# Altium PCB PruebaTamano.PcbDoc
Units mm, origin at the board's own origin, x right, y up, seen from the top; angles counter-clockwise.
Board outline 100 x 100 mm, 4 copper layers (Top Layer, Int1 (V5), Int2 (PWR), Bottom Layer), stack 1.369 mm thick; 79 components, 45 nets, 282 pads, 6 vias.
Unrouted connection lines stored in the file: 129.
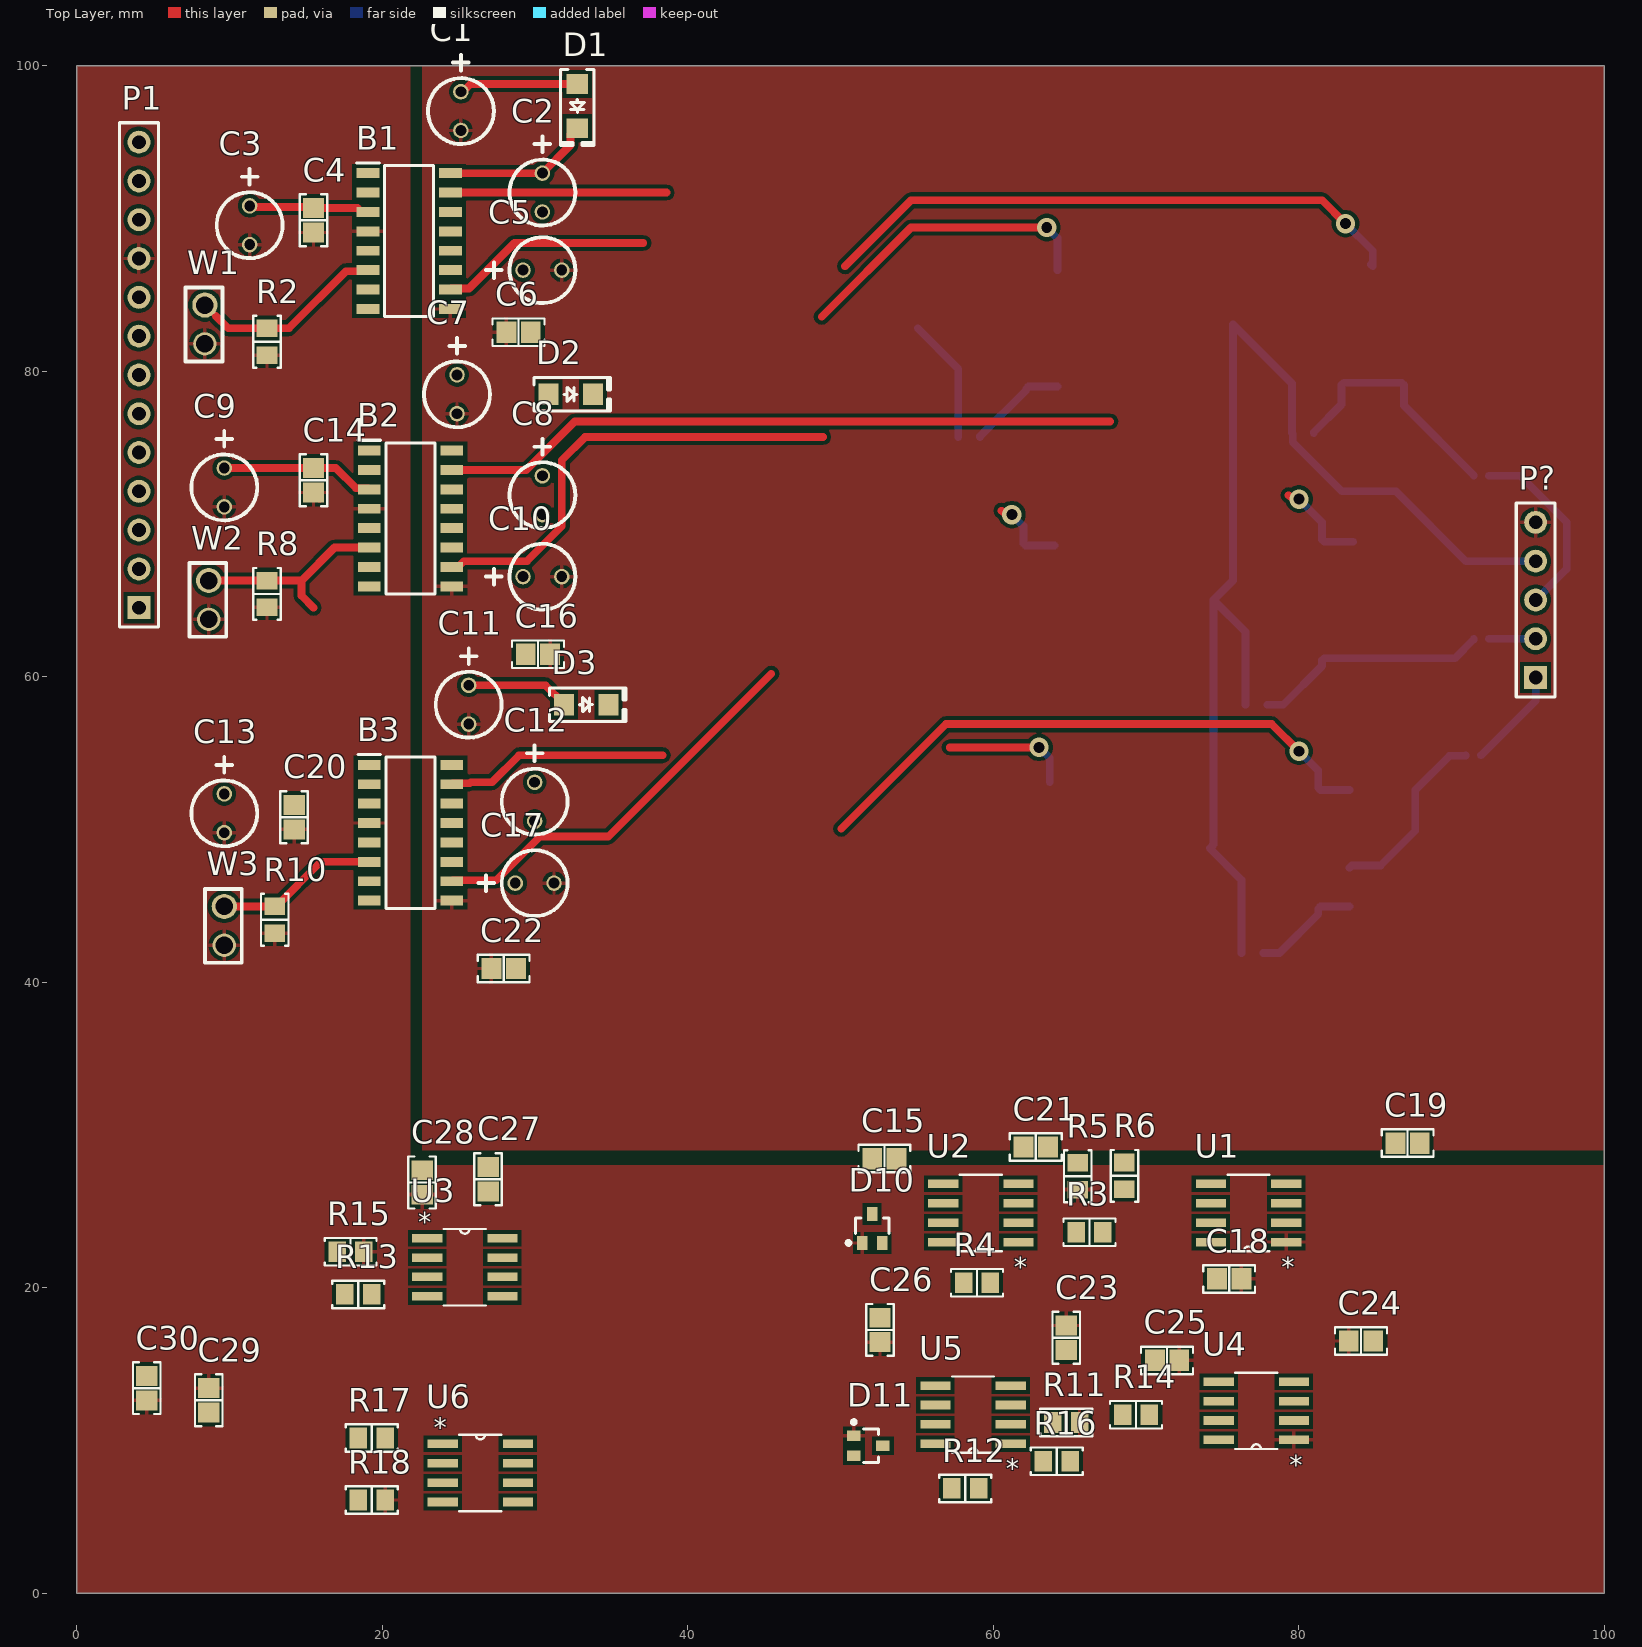
[diagram p0: Top Layer view]
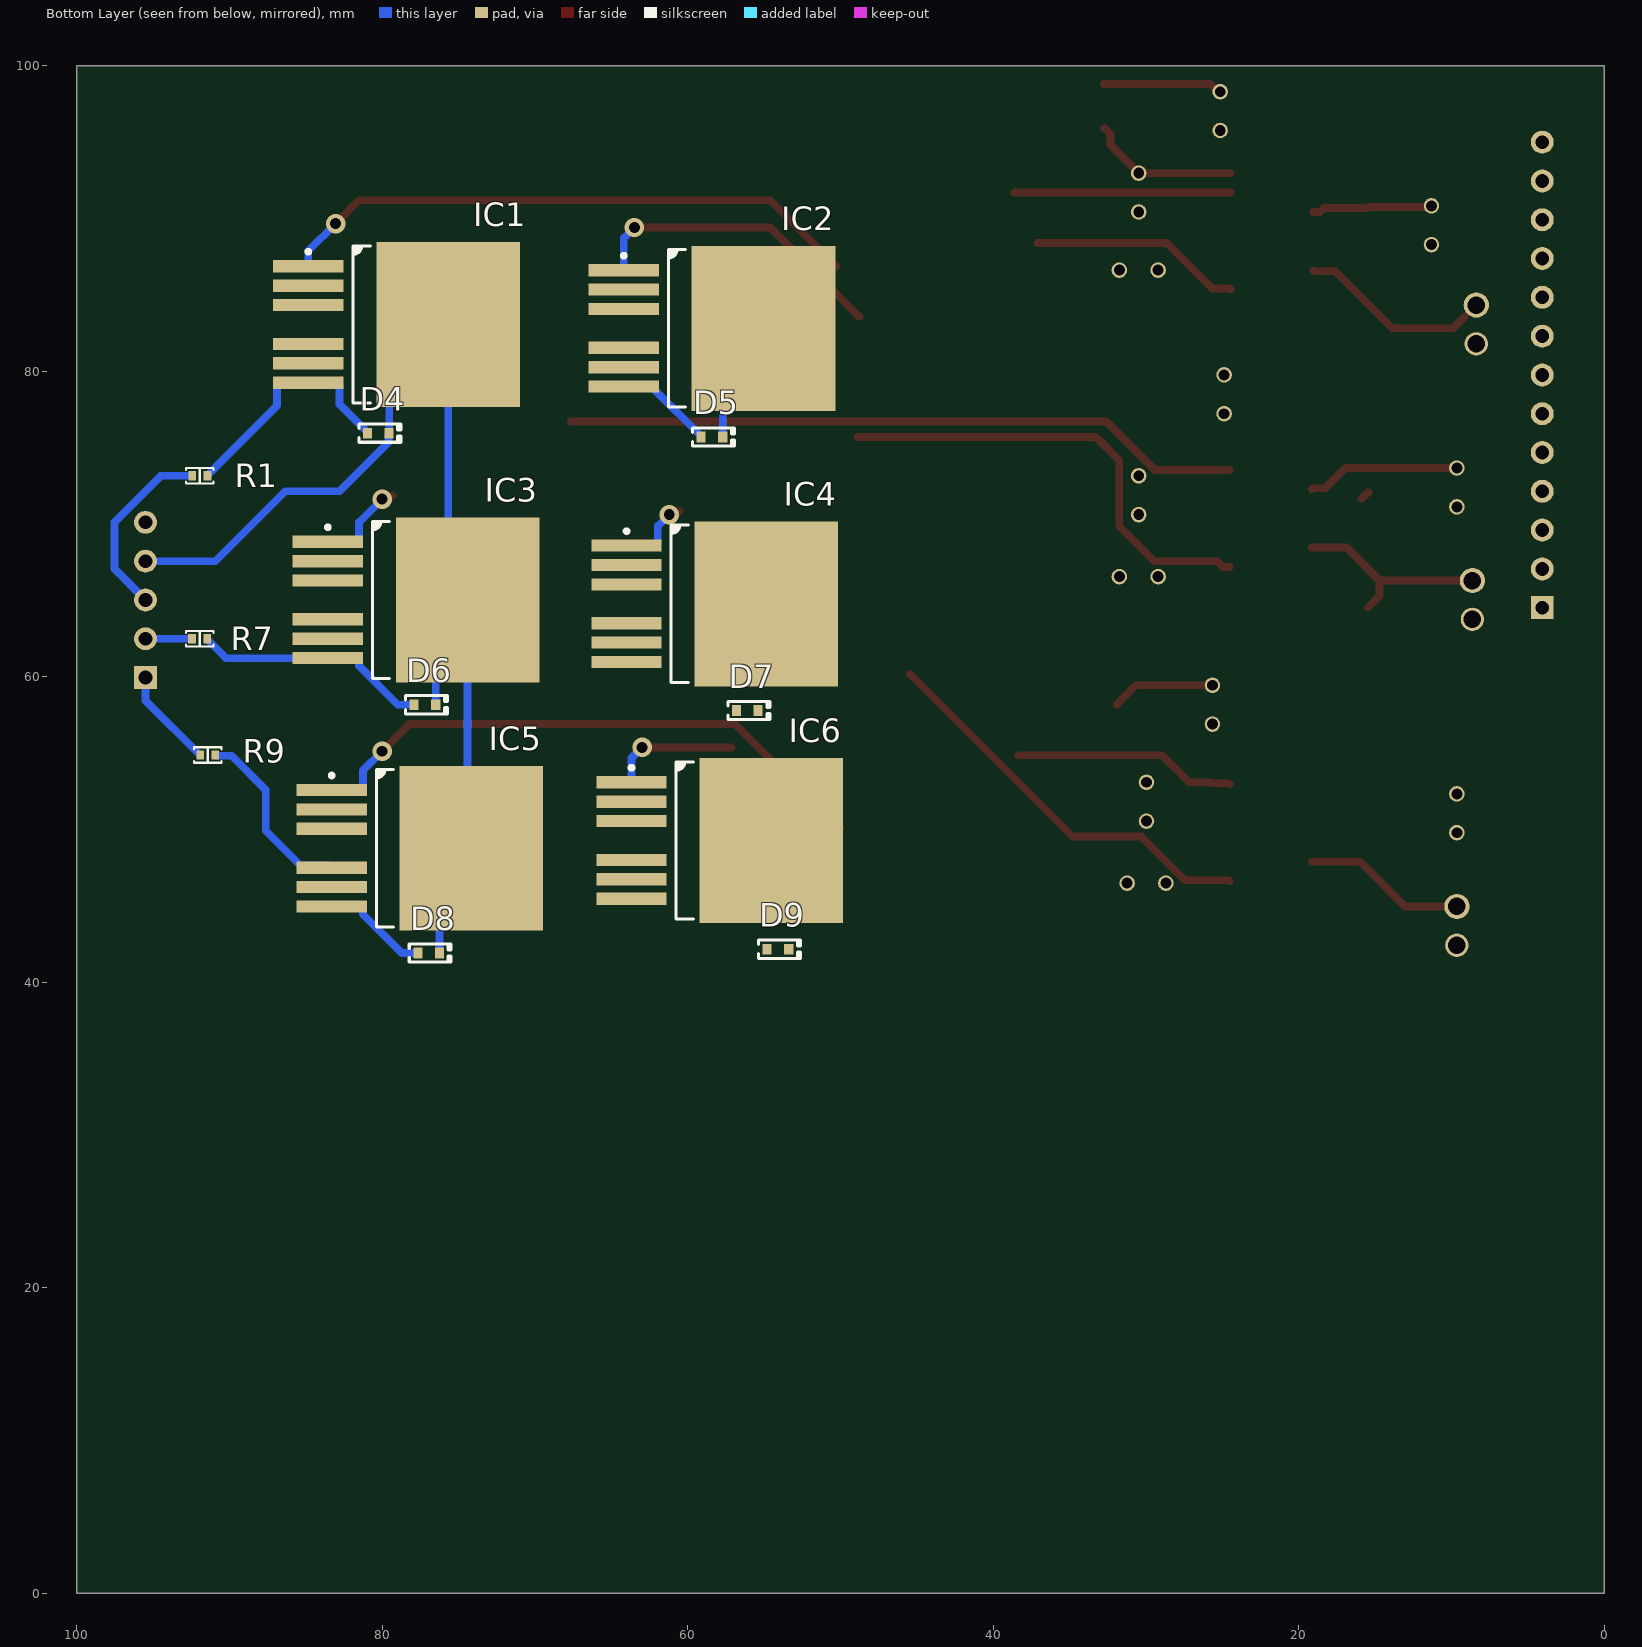
[diagram p1: Bottom Layer view, seen from below]
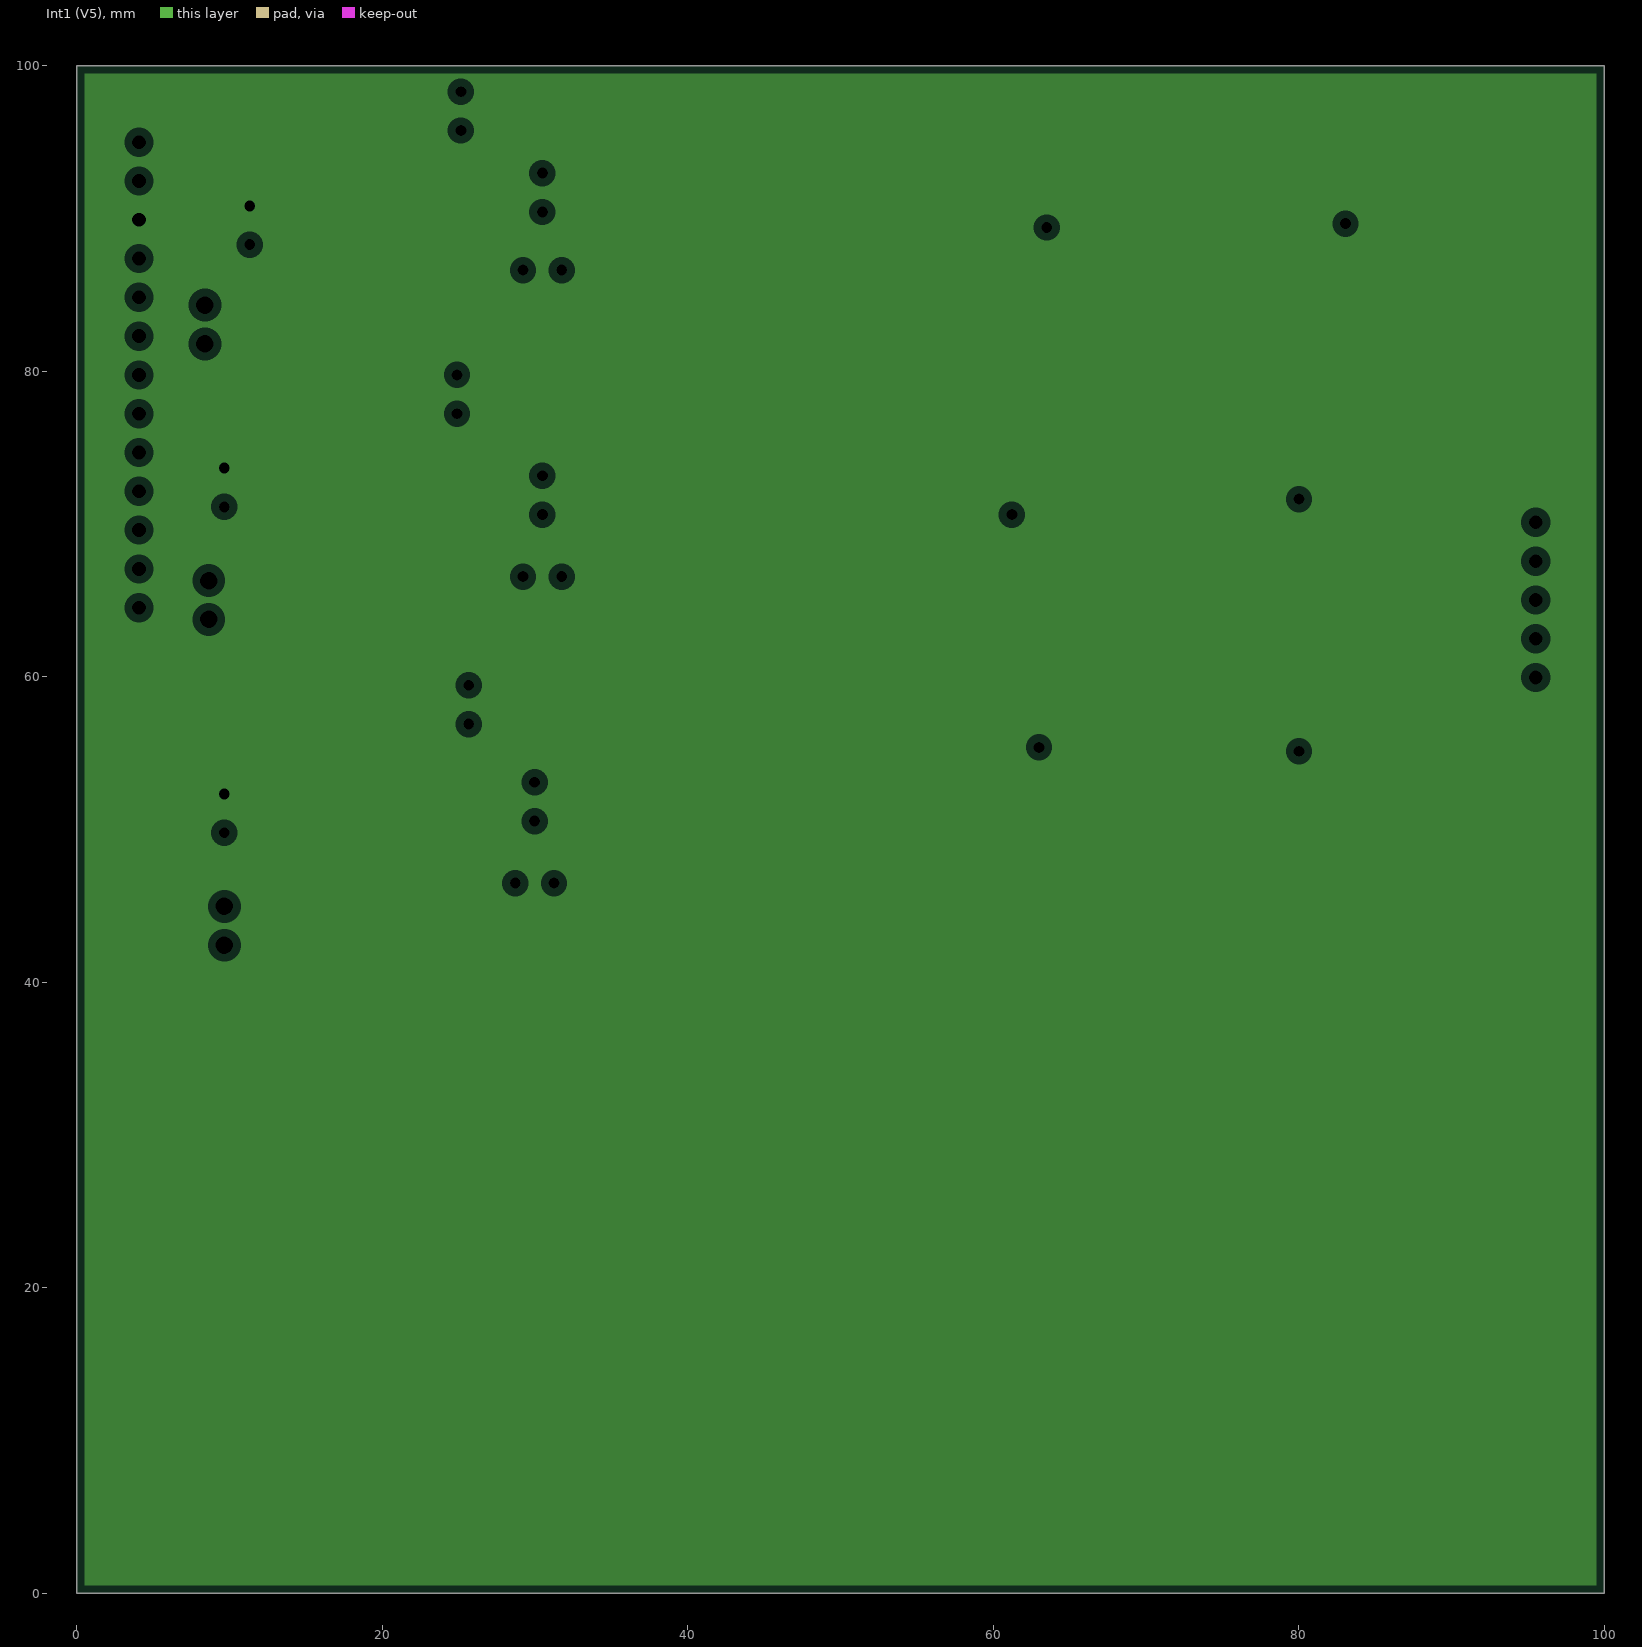
[diagram p2: Int1 (V5), clearances drawn from the general rule]
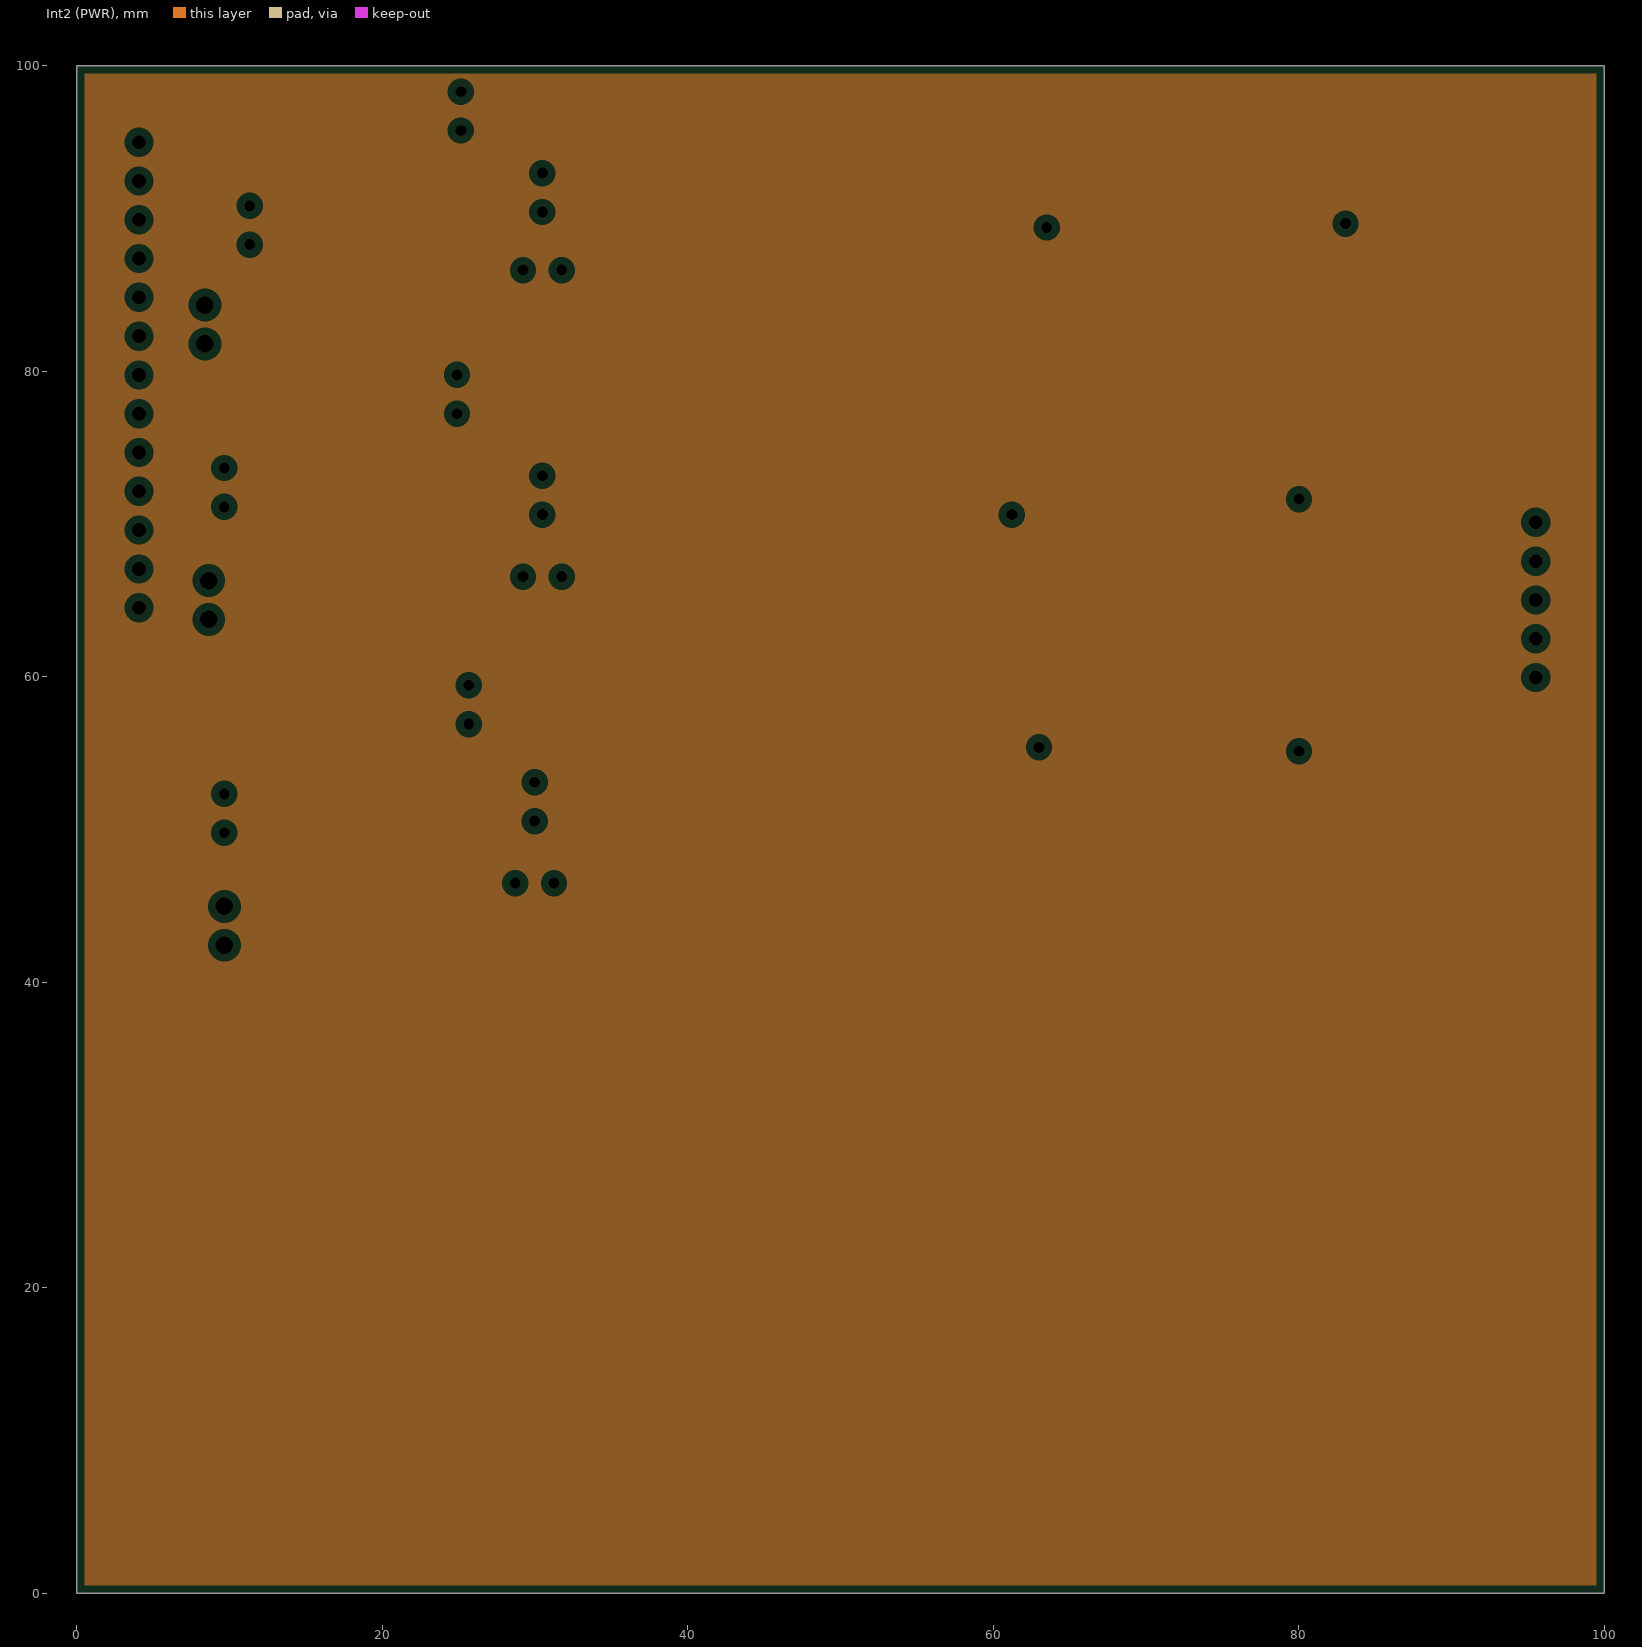
[diagram p3: Int2 (PWR), clearances drawn from the general rule]

## Layer stack, top to bottom
Top Solder: solder mask 0.0254, SM-001, Dk 4
Top Layer: signal copper 0.035
Dielectric 1: prepreg 0.1295, PP-017, Dk 4.3
Dielectric 2: prepreg 0.1295, PP-017, Dk 4.3
Int1 (V5): plane copper 0.035, net V5
Dielectric 3: core 0.7112, Core-039, Dk 4.8
Int2 (PWR): plane copper 0.035
Dielectric 4: prepreg 0.1295, PP-017, Dk 4.3
Dielectric 5: prepreg 0.1295, PP-017, Dk 4.3
Bottom Layer: signal copper 0.035
Bottom Solder: solder mask 0.0254, SM-001, Dk 4

## Board outline
0,0 100,0 100,100 0,100

## Design rules (kind name [scope] priority, off if disabled: settings)
Clearance [All] p1: gap=0.254 ignorepadtopadclearanceinfootprint=FALSE except(0: Arc-Hole Track-Hole SMDPad-Hole THPad-Hole Via-Hole Fill-Hole Poly-Hole Region-Hole Text-Hole)
PlaneClearance [All] p1: clearance=0.508
PlaneConnect [All] p1: planeconnectstyle=Relief reliefexpansion=0.508 reliefentries=4 reliefconductorwidth=0.254 reliefairgap=0.254
PolygonConnect [All] p1: connectstyle=Relief reliefconductorwidth=0.254 reliefentries=4 polygonreliefangle="90 Angle" airgapwidth=0.254
RoutingVias [All] p1: holewidth=0.711 width=1.27 viastyle="Through Hole" minholewidth=0.711 minwidth=1.27 maxholewidth=0.711 maxwidth=1.27
SolderMaskExpansion [All] p1: expansion=0.102 istentingtop=FALSE
UnRoutedNet [All] p1: checkbadconnections=TRUE
Width [All] p1: maxlimit=0.762 minlimit=0.254 preferedwidth=0.508 minimp=50.000000 maximp=50.000000 favimp=50.000000
27 further rules are at their usual default settings.

## Components (designator, comment, footprint, x,y, rotation, side; value= is the part's Value field where it differs from the comment)
B1 "SI8238BB-D-IS1" SOIC127P600X175-16N 21.75,88.519 r0 top
B2 "SI8238BB-D-IS1" SOIC127P600X175-16N 21.844,70.358 r0 top
B3 "SI8238BB-D-IS1" SOIC127P600X175-16N 21.844,49.784 r0 top
C1 "Cap Pol1" CAPACITORRADIALELECTROLYTIC 25.146,98.298 r270 top value=1uF
C2 "Cap Pol1" CAPACITORRADIALELECTROLYTIC 30.48,92.964 r270 top value=CB
C3 "Cap Pol1" CAPACITORRADIALELECTROLYTIC 11.316,90.826 r270 top value=1uF
C4 "0.1 µF" "CAP 0805_2012" 15.494,89.878 r90 top
C5 "Cap Pol1" CAPACITORRADIALELECTROLYTIC 29.21,86.614 r0 top value=10uF
C6 "0.1 µF" "CAP 0805_2012" 28.918,82.55 r0 top
C7 "Cap Pol1" CAPACITORRADIALELECTROLYTIC 24.892,79.756 r270 top value=1uF
C8 "Cap Pol1" CAPACITORRADIALELECTROLYTIC 30.48,73.152 r270 top value=CB
C9 "Cap Pol1" CAPACITORRADIALELECTROLYTIC 9.652,73.66 r270 top value=1uF
C10 "Cap Pol1" CAPACITORRADIALELECTROLYTIC 29.21,66.548 r0 top value=10uF
C11 "Cap Pol1" CAPACITORRADIALELECTROLYTIC 25.654,59.436 r270 top value=1uF
C12 "Cap Pol1" CAPACITORRADIALELECTROLYTIC 29.972,53.086 r270 top value=CB
C13 "Cap Pol1" CAPACITORRADIALELECTROLYTIC 9.652,52.324 r270 top value=1uF
C14 "0.1 µF" "CAP 0805_2012" 15.494,72.86 r90 top
C15 "0.1 µF" "CAP 0805_2012" 52.87,28.448 r0 top
C16 "0.1 µF" "CAP 0805_2012" 30.188,61.468 r180 top
C17 "Cap Pol1" CAPACITORRADIALELECTROLYTIC 28.702,46.482 r0 top value=10uF
C18 "0.1 µF" "CAP 0805_2012" 75.438,20.574 r0 top
C19 "0.1 µF" "CAP 0805_2012" 87.122,29.464 r0 top
C20 "0.1 µF" "CAP 0805_2012" 14.224,50.8 r90 top
C21 "0.1 µF" "CAP 0805_2012" 62.776,29.21 r0 top
C22 "0.1 µF" "CAP 0805_2012" 27.94,40.894 r0 top
C23 "0.1 µF" "CAP 0805_2012" 64.77,16.726 r90 top
C24 "0.1 µF" "CAP 0805_2012" 84.074,16.51 r180 top
C25 "0.1 µF" "CAP 0805_2012" 71.374,15.24 r180 top
C26 "0.1 µF" "CAP 0805_2012" 52.578,17.234 r90 top
C27 "0.1 µF" "CAP 0805_2012" 26.924,27.102 r90 top
C28 "0.1 µF" "CAP 0805_2012" 22.606,26.886 r90 top
C29 "0.1 µF" "CAP 0805_2012" 8.636,12.624 r90 top
C30 "0.1 µF" "CAP 0805_2012" 4.572,13.424 r90 top
D1 "V3FL45-M3/H" "SMF DO-219AB" 32.766,97.356 r270 top
D2 "V3FL45-M3/H" "SMF DO-219AB" 32.332,78.486 r0 top
D3 "V3FL45-M3/H" "SMF DO-219AB" 33.348,58.166 r0 top
D4 "1PS79SB10,115" SOD-523 80.264,75.946 r180 bottom
D5 "1PS79SB10,115" SOD-523 58.42,75.692 r180 bottom
D6 "1PS79SB10,115" SOD-523 77.216,58.166 r180 bottom
D7 "1PS79SB10,115" SOD-523 56.105,57.785 r180 bottom
D8 "1PS79SB10,115" SOD-523 76.962,41.91 r180 bottom
D9 "1PS79SB10,115" SOD-523 54.102,42.164 r180 bottom
D10 "BZX84C3V0W-7-F" "DIODES SOT-323-3" 52.07,23.876 r90 top
D11 "BZX84C3V0W-7-F" "DIODES SOT-323-3" 51.816,9.652 r0 top
IC1 "IRFS3006TRL7PP" "INFINEON TO-263-7" 79.067,83.058 r180 bottom
IC2 "IRFS3006TRL7PP" "INFINEON TO-263-7" 58.42,82.804 r180 bottom
IC3 "IRFS3006TRL7PP" "INFINEON TO-263-7" 77.791,65.024 r180 bottom
IC4 "IRFS3006TRL7PP" "INFINEON TO-263-7" 58.239,64.77 r180 bottom
IC5 "IRFS3006TRL7PP" "INFINEON TO-263-7" 77.543,48.768 r180 bottom
IC6 "IRFS3006TRL7PP" "INFINEON TO-263-7" 57.912,49.276 r180 bottom
P1 "Header 13" HDR1X13 4.064,64.516 r90 top
P? "Header 5" HDR1X5 95.504,59.944 r90 top
R1 "270 mOhms" "STACKPOLE CSR0402" 91.948,73.152 r0 bottom
R2 "RDT" "RES 0805_2012" 12.446,81.929 r90 top
R3 "2 kOhms" "RES 0805_2012" 66.294,23.622 r0 top
R4 "30 kOhms" "RES 0805_2012" 58.928,20.32 r0 top
R5 "2 kOhms" "RES 0805_2012" 65.532,27.291 r90 top
R6 "30 kOhms" "RES 0805_2012" 68.58,27.319 r90 top
R7 "270 mOhms" "STACKPOLE CSR0402" 91.956,62.484 r0 bottom
R8 "RDT" "RES 0805_2012" 12.446,65.419 r90 top
R9 "270 mOhms" "STACKPOLE CSR0402" 91.432,54.864 r0 bottom
R10 "RDT" "RES 0805_2012" 12.954,44.083 r90 top
R11 "2 kOhms" "RES 0805_2012" 64.77,11.176 r0 top
R12 "30 kOhms" "RES 0805_2012" 58.166,6.858 r0 top
R13 "10 kOhms" "RES 0805_2012" 18.429,19.558 r0 top
R14 "2 kOhms" "RES 0805_2012" 69.342,11.684 r0 top
R15 "1428.57" "RES 0805_2012" 17.921,22.352 r0 top
R16 "30 kOhms" "RES 0805_2012" 64.149,8.636 r0 top
R17 "10 kOhms" "RES 0805_2012" 19.304,10.16 r0 top
R18 "1428.57" "RES 0805_2012" 19.304,6.096 r0 top
U1 "INA148UAG4" D8 76.708,24.892 r180 top
U2 "OPA277UA" D8 59.182,24.892 r180 top
U3 "OPA277UA" D8 25.4,21.336 r0 top
U4 "INA148UAG4" D8 77.216,11.938 r180 top
U5 "OPA277UA" D8 58.674,11.684 r180 top
U6 "OPA277UA" D8 26.416,7.874 r0 top
W1 "Jumper" Jumper_2_pos 8.382,83.058 r90 top
W2 "Jumper" Jumper_2_pos 8.636,65.024 r90 top
W3 "Jumper" Jumper_2_pos 9.652,43.688 r90 top

## Footprints (in the part's own frame and the unit in brackets; to place one, negate y for a bottom-side part, rotate by r counter-clockwise, add the part's x,y. Pads: shape width x height; smd on the part's side, far side on the other; paste and mask are expansions set on the pad)
"CAP 0805_2012" [mm] "Chip Capacitor, 2-Leads, Body 2.00x1.20mm, IPC Medium Density"
  rect 1.3x1.4 smd: 1(-0.8,0) 2(0.8,0)
  silkscreen extent -1.7,-0.9 1.7,0.9, body extent -1,-0.64 1,0.64, height 1.26
CAPACITORRADIALELECTROLYTIC [mil]
  round 40 / inner round 50 / far side round 40 hole 28: 1(0,0) 2(100,0)
  silkscreen extent -95,-85 135,85
D8 [mil]
  rect 78x22 smd paste-39 mask-39: 1(-97,75) 2(-97,25) 3(-97,-25) 4(-97,-75) 5(97,-75) 6(97,-25) 7(97,25) 8(97,75)
  silkscreen extent -54,-98 54,98, body extent -122,-99 122,99, height 69
"DIODES SOT-323-3" [mm] "SOT323, 3-Leads, Body 2.00x2.10mm, Pitch 0.65mm, IPC Medium Density"
  rect 0.9x0.7 smd: 1(-0.95,0.65) 2(0.95,0) 3(-0.95,-0.65)
  silkscreen extent -1.07,-1.1 0.67,1.67, body extent -1.06,-1 1.06,1, height 1
HDR1X5 [mm] "Connector; Header; 5 Position"
  rect 1.5x1.5 hole 0.9: 1(0,0)
  round 1.5 hole 0.9: 2(2.54,0) 3(5.08,0) 4(7.62,0) 5(10.16,0)
  silkscreen extent -1.27,-1.27 11.43,1.27
HDR1X13 [mm] "Connector; Header; 13 Position"
  rect 1.5x1.5 hole 0.9: 1(0,0)
  round 1.5 hole 0.9: 2(2.54,0) 3(5.08,0) 4(7.62,0) 5(10.16,0) 6(12.7,0) 7(15.24,0) 8(17.78,0) 9(20.32,0) 10(22.86,0) 11(25.4,0) 12(27.94,0) 13(30.48,0)
  silkscreen extent -1.27,-1.27 31.75,1.27
"INFINEON TO-263-7" [mm] "D2-PAK, 7-Pads, Body 7.82x8.52mm (max), IPC Medium Density"
  rect 4.6x0.8 smd: 1(-5.775,3.81) 2(-5.775,2.54) 3(-5.775,1.27) 5(-5.775,-1.27) 6(-5.775,-2.54) 7(-5.775,-3.81)
  rect 9.4x10.8 smd: 8(3.375,0)
  silkscreen extent -5.9,-5.15 -1.73,5.15, body extent -7.62,-5.08 7.63,5.08, height 4.54
Jumper_2_pos [mil] "2 pins jumper."
  round 60 hole 45: 1(-50,0)
  round 65 hole 45: 2(50,0)
  silkscreen extent -95,-45 95,50, body extent -78,-37 80,41, height 207
"RES 0805_2012" [mm] "Chip Resistor, 2-Leads, Body 2.00x1.25mm, IPC Medium Density"
  rect 1.15x1.35 smd: 1(-0.875,0) 2(0.875,0)
  silkscreen extent -1.7,-0.9 1.7,0.9, body extent -1,-0.62 1,0.63, height 0.6
"SMF DO-219AB" [mm] "Molded Diode, 2-Leads, Body 3.90x1.90mm, IPC Medium Density"
  rect 1.3x1.4 smd: 1(-1.45,0) 2(1.45,0)
  silkscreen extent -2.4,-1.1 2.59,1.1, body extent -1.5,-0.9 1.5,0.9, height 1.18
SOD-523 [mm] "Molded Diode, 2-Leads, Body 1.60x0.80mm, IPC Medium Density"
  rect 0.6x0.7 smd: 1(-0.71,0) 2(0.71,0)
  silkscreen extent -1.27,-0.6 1.47,0.6, body extent -0.8,-0.4 0.8,0.4, height 0.82
SOIC127P600X175-16N [mm]
  rect 1.5x0.65 smd: 1(-2.7,4.445) 2(-2.7,3.175) 3(-2.7,1.905) 4(-2.7,0.635) 5(-2.7,-0.635) 6(-2.7,-1.905) 7(-2.7,-3.175) 8(-2.7,-4.445) 9(2.7,-4.445) 10(2.7,-3.175) 11(2.7,-1.905) 12(2.7,-0.635) 13(2.7,0.635) 14(2.7,1.905) 15(2.7,3.175) 16(2.7,4.445)
  silkscreen extent -3.45,-4.95 1.6,5.12
"STACKPOLE CSR0402" [mm] "Chip Resistor, 2-Leads, Body 1.0x0.5mm, IPC Medium Density"
  rect 0.5x0.6 smd: 1(-0.5,0) 2(0.5,0)
  silkscreen extent -0.9,-0.51 0.9,0.51, body extent -0.52,-0.25 0.53,0.25, height 0.32

## Part data
B1 B2 B3: "SILICON LABS - SI8238BB-D-IS1 - DIGITAL ISOLATOR, 30NS, NSOIC-16", Manufacturer_Name="Silicon Labs", Mouser Part Number=634-SI8238BB-D-IS1, Arrow Part Number=SI8238BB-D-IS1, Arrow Price/Stock=https://www.arrow.com/en/products/si8238bb-d-is1/silicon-labs, Datasheet Link=https://datasheet.datasheetarchive.com/originals/distributors/DKDS-37/728994.pdf, Geometry.Height=1.75mm, Manufacturer_Part_Number=SI8238BB-D-IS1, Mouser Price/Stock=https://www.mouser.co.uk/ProductDetail/Silicon-Labs/SI8238BB-D-IS1?qs=p9T7GgSe1IEr3RhvGCWqzw%3D%3D
C1 C2 C3 C5 C7 C8 C9 C10 C11 C12 C13 C17: "Polarized Capacitor (Radial)", LatestRevisionDate=17-Jul-2002, LatestRevisionNote="Re-released for DXP Platform.", PackageDescription="Polarized Capacitor (Radial); 2 Leads", PackageReference=RB7.6-15, Published=8-Jun-2000, Publisher="Altium Limited"
C4 C6 C14 C15 C16 C18 C19 C20 C21 C22 C23 C24 C25 C26 C27 C28 C29 C30: library part CC0805MRX7R9BB104, "CAP CER 0.1UF 50V X7R 0805", Device Package="0805 (2012 Metric)", Manufacturer=Yageo, Operating Temperature="-55°C ~ 125°C", Supplier Part Number 1=311-4351-1-ND, Temperature Coefficient=X7R, Tolerance=±20%, Voltage - Rated=50V, Applications="General Purpose", Capacitance="0.1 µF", ComponentLink1Description=Datasheet, ComponentLink1URL=https://www.yageo.com/upload/media/product/productsearch/datasheet/mlcc/UPY-GPHC_X7R_6.3V-to-50V_18.pdf, ComponentLink2Description="DigiKey Link", ComponentLink2URL=https://www.digikey.com/en/products/detail/yageo/CC0805MRX7R9BB104/5884281, LastUpdated="15/11/2023 20:14:20", Lifecycle Status=Active, Minimum Order=1, Mounting Type="Surface Mount, MLCC", Package / Case="0805 (2012 Metric)", Packaging=TapeAndReel, Part Number=CC0805MRX7R9BB104, Part Status=Active, PartId=2475, Price=0.01, Series=CC, Size / Dimension="0.079\" L x 0.049\" W (2.00mm x 1.25mm)", Supplier 1=DigiKey, Thickness (Max)="0.037\" (0.95mm)"
D1 D2 D3: "3A,45V,SMF,TRENCH SKY RECT.", Capacitance @ Vr, F="370pF @ 4V, 1MHz", Current - Average Rectified (Io)=3A, Current - Reverse Leakage @ Vr="750µA @ 45V", Manufacturer="Vishay Semiconductor Diodes Division", Operating Temperature - Junction="-40°C ~ 150°C", Package / Case=DO-219AB, Supplier Device Package="DO-219AB (SMF)", Supplier Part Number 1=V3FL45-M3/HGICT-ND, Voltage - DC Reverse (Vr) (Max)=45V, Voltage - Forward (Vf) (Max) @ If="580mV @ 3A", ComponentLink1Description=Datasheet, ComponentLink1URL=http://www.vishay.com/docs/87568/v3fl45.pdf, ComponentLink2Description="DigiKey Link", ComponentLink2URL=http://digikey.com/product-detail/en/vishay-semiconductor-diodes-division/V3FL45-M3-H/V3FL45-M3-HGICT-ND/9360099, Diode Type=Schottky, LastUpdated="24/11/2023 21:33:22", Lifecycle Status=Active, Minimum Order=1, Mounting Type="Surface Mount", Packaging=TapeAndReel, Part Number=V3FL45-M3/H, Part Status=Active, PartId=1303, Price=0.10, Series="eSMP®, TMBS®", Speed="Fast Recovery =< 500ns, > 200mA (Io)", Supplier 1=DigiKey
D4 D5 D6 D7 D8 D9: "DIODE SCHOTTKY 30V 200MA SOD523", Capacitance @ Vr, F="10pF @ 1V, 1MHz", Current - Average Rectified (Io)=200mA, Current - Reverse Leakage @ Vr="2 µA @ 25 V", Manufacturer="Nexperia USA Inc.", Operating Temperature - Junction="125°C (Max)", Package / Case="SC-79, SOD-523", Supplier Device Package=SOD-523, Supplier Part Number 1=1727-4780-1-ND, Voltage - DC Reverse (Vr) (Max)="30 V", Voltage - Forward (Vf) (Max) @ If="800 mV @ 100 mA", ComponentLink1Description=Datasheet, ComponentLink1URL=https://assets.nexperia.com/documents/data-sheet/1PS79SB10.pdf, ComponentLink2Description="DigiKey Link", ComponentLink2URL=https://www.digikey.com/en/products/detail/nexperia-usa-inc/1PS79SB10-115/1229075, Diode Type=Schottky, LastUpdated="23/11/2023 21:28:29", Lifecycle Status=Active, Minimum Order=1, Mounting Type="Surface Mount", Packaging=TapeAndReel, Part Number=1PS79SB10,115, Part Status=Active, PartId=2828, Price=0.03, Series=-, Speed="Small Signal =< 200mA (Io), Any Speed", Supplier 1=DigiKey
D10 D11: "DIODE ZENER 3V 200MW SOT323", Current - Reverse Leakage @ Vr="20 µA @ 1 V", Manufacturer="Diodes Incorporated", Operating Temperature="-65°C ~ 125°C", Package / Case="SC-70, SOT-323", Power - Max="200 mW", Supplier Device Package=SOT-323, Supplier Part Number 1=BZX84C3V0W-FDICT-ND, Tolerance=±7%, Voltage - Forward (Vf) (Max) @ If="900 mV @ 10 mA", Voltage - Zener (Nom) (Vz)="3 V", ComponentLink1Description=Datasheet, ComponentLink1URL=https://www.diodes.com/assets/Datasheets/ds30066.pdf, ComponentLink2Description="DigiKey Link", ComponentLink2URL=https://www.digikey.com/en/products/detail/diodes-incorporated/BZX84C3V0W-7-F/814837, Impedance (Max) (Zzt)="95 Ohms", LastUpdated="24/11/2023 21:30:31", Lifecycle Status=Active, Minimum Order=1, Mounting Type="Surface Mount", Packaging=TapeAndReel, Part Number=BZX84C3V0W-7-F, Part Status=Active, PartId=887, Price=0.03, Series=-, Supplier 1=DigiKey
IC1 IC2 IC3 IC4 IC5 IC6: "MOSFET N-CH 60V 240A D2PAK", Current - Continuous Drain (Id) @ 25°C="240A (Tc)", Drain to Source Voltage (Vdss)="60 V", Drive Voltage (Max Rds On,  Min Rds On)=10V, Input Capacitance (Ciss) (Max) @ Vds="8850 pF @ 50 V", Manufacturer="Infineon Technologies", Operating Temperature="-55°C ~ 175°C (TJ)", Package / Case="TO-263-7, D²Pak (6 Leads + Tab), TO-263CB", Power Dissipation (Max)="375W (Tc)", Supplier Device Package="D2PAK (7-Lead)", Supplier Part Number 1=IRFS3006TRL7PPCT-ND, ComponentLink1Description=Datasheet, ComponentLink1URL=https://www.infineon.com/dgdl/irfs3006-7ppbf.pdf?fileId=5546d462533600a4015356364189214d, ComponentLink2Description="DigiKey Link", ComponentLink2URL=https://www.digikey.com/en/products/detail/infineon-technologies/IRFS3006TRL7PP/2096605, FET Type=N-Channel, Gate Charge (Qg) (Max) @ Vgs="300 nC @ 10 V", LastUpdated="01/11/2023 20:47:46", Lifecycle Status=Active, Minimum Order=1, Mounting Type="Surface Mount", Packaging=TapeAndReel, Part Number=IRFS3006TRL7PP, Part Status=Active, Price=2.81, Rds On (Max) @ Id, Vgs="2.1mOhm @ 168A, 10V", Series=HEXFET®, Supplier 1=DigiKey, Technology="MOSFET (Metal Oxide)", Vgs (Max)=±20V, Vgs(th) (Max) @ Id="4V @ 250µA"
P1: "Header, 13-Pin", LatestRevisionDate=17-Jul-2002, LatestRevisionNote="Re-released for DXP Platform.", Publisher="Altium Limited"
P?: "Header, 5-Pin", LatestRevisionDate=17-Jul-2002, LatestRevisionNote="Re-released for DXP Platform.", Publisher="Altium Limited"
R1 R7 R9: library part RL73N1ER27JTD, "RES 0.27 OHM 5% 1/16W 0402", Device Package="0402 (1005 Metric)", Manufacturer="TE Connectivity Passive Product", Operating Temperature="-55°C ~ 155°C", Power (Watts)="0.063W, 1/16W", Supplier Device Package=0402, Supplier Part Number 1=A138777CT-ND, Temperature Coefficient=±300ppm/°C, Tolerance=±5%, ComponentLink1Description=Datasheet, ComponentLink1URL=https://www.te.com/commerce/DocumentDelivery/DDEController?Action=srchrtrv&DocNm=1773269&DocType=DS&DocLang=English, ComponentLink2Description="DigiKey Link", ComponentLink2URL=https://www.digikey.com/en/products/detail/te-connectivity-passive-product/RL73N1ER27JTD/2364932, Composition="Thick Film", Features="Current Sense", Height - Seated (Max)="0.017\" (0.43mm)", LastUpdated="02/11/2023 20:28:47", Lifecycle Status=Active, Minimum Order=1, Number of Terminations=2, Package / Case="0402 (1005 Metric)", Packaging=TapeAndReel, Part Number=RL73N1ER27JTD, Part Status=Active, PartId=5, Price=0.03, Resistance="270 mOhms", Series="RL73, CGS", Size / Dimension="0.039\" L x 0.020\" W (1.00mm x 0.50mm)", Supplier 1=DigiKey
R2 R3 R4 R5 R6 R8 R10 R11 R12 R13 R14 R15 R16 R17 R18: library part CR0805-JW-204ELF, "RES SMD 200K OHM 5% 1/8W 0805", Device Package="0805 (2012 Metric)", Manufacturer="Bourns Inc.", Operating Temperature="-55°C ~ 155°C", Power (Watts)="0.125W, 1/8W", Resistance="200 kOhms", Supplier Device Package=0805, Supplier Part Number 1=118-CR0805-JW-204ELFCT-ND, Temperature Coefficient=±200ppm/°C, Tolerance=±5%, ComponentLink1Description=Datasheet, ComponentLink1URL=https://www.bourns.com/docs/product-datasheets/cr.pdf?sfvrsn=574d41f6_14, ComponentLink2Description="DigiKey Link", ComponentLink2URL=https://www.digikey.com/en/products/detail/bourns-inc/CR0805-JW-204ELF/3785267, Composition="Thick Film", Features="Moisture Resistant", Height - Seated (Max)="0.024\" (0.60mm)", LastUpdated="02/11/2023 20:02:13", Lifecycle Status=Active, Minimum Order=1, Number of Terminations=2, Package / Case="0805 (2012 Metric)", Packaging=TapeAndReel, Part Number=CR0805-JW-204ELF, Part Status=Active, PartId=69673, Price=0.01, Series=CR0805, Size / Dimension="0.079\" L x 0.049\" W (2.00mm x 1.25mm)", Supplier 1=DigiKey
U1 U2 U3 U4 U5 U6: "No Description Available", Mfr_Name="Texas Instruments", Copyright="Copyright (C) 2023 Ultra Librarian. All rights reserved.", RefDes=RefDes, Type=DEV
  U1 U4: Manufacturer_Part_Number=INA148UAG4
  U2 U3 U5 U6: Manufacturer_Part_Number=OPA277UA
W1 W2 W3: "Jumper Wire", LatestRevisionDate=17-Jul-2002, LatestRevisionNote="Re-released for DXP Platform.", PackageDescription="Radial Cap, Thru-Hole; 2 Leads; 0.2 in Pin Spacing", PackageReference=RAD-0.2, Published=24-Mar-1999, Publisher="Altium Limited"

## Via types
v1: diameter 1.27, hole 0.711, Top Layer to Bottom Layer, 6 vias

## Nets (pads, with @x,y where several pads share a name; then routed paths per layer and width w, separated by ;. In a path a pad name is that pad's centre, name@x,y a point inside that pad or via, vN(x,y) a via of type N, cw(c..) or ccw(c..) an arc to the next point about the centre after c; other vN are vias at no path point)
-V12: C19.2 C21.2 C25.2 C26.2 C28.2 C30.2 P1.13 U1.4 U2.4 U3.4 U4.4 U5.4 U6.4
AGND: B1.9 B2.9 B3.9 C1.2 C5.2 C6.1 C7.2 C10.2 C11.2 C16.1 C17.2 C22.1 D5.1 D7.1 D9.1 IC2.2 IC2.3 IC2.5 IC2.6 IC2.7 IC4.2 IC4.3 IC4.5 IC4.6 IC4.7 IC6.2 IC6.3 IC6.5 IC6.6 IC6.7 P?.5 | length 6.5
  Bottom Layer w0.508: D5.1 59.13,75.742 62.149,78.761 62.149,78.848 62.295,78.994 IC2.7
BOOTSTRAP_IC_A_INPUT: B1.16 C2.1 D1.2 | length 9.9
  Top Layer w0.508: B1.16 C2.1 32.32,94.804 32.32,95.51 32.716,95.906 D1.2
BOOTSTRAP_IC_B_INPUT: B2.16 C8.1 D2.2
BOOTSTRAP_IC_C_INPUT: B3.16 C12.1 D3.2
DISABLE_GPIO: B1.5 B2.5 B3.5 P1.9
GND: B1.4 B2.4 B3.4 C3.2 C4.1 C9.2 C13.2 C14.1 C15.2 C18.2 C19.1 C20.1 C21.1 C23.2 C24.2 C25.1 C26.1 C27.2 C28.1 C29.2 C30.1 D10.1 D11.1 P1.10 R2.1 R5.1 R8.1 R10.1 R11.2 R15.2 R18.2 U1.1 U4.1 W1.1 W2.1 W3.1 | length 0.6
  Top Layer w0.508: C14.1@15.444,72.06 C14.1 C14.1@15.887,71.667
NetB1_6: B1.6 R2.2 W1.2 | length 11.9
  Top Layer w0.508: 9.1,83.61 9.906,82.804 R2.2 13.883,82.804 17.622,86.543 18.979,86.543 B1.6
NetB1_11: B1.11 C5.1 C6.2
NetB2_6: B2.6 R8.2 W2.2 | length 13.5
  Top Layer w0.508: W2.2 R8.2 14.714,66.294 ; 15.494,64.516 14.714,65.296 14.714,66.294 ; B2.6 16.873,68.453 14.714,66.294
NetB2_11: B2.11 C10.1 C16.2
NetB3_6: B3.6 R10.2 W3.2 | length 10.7
  Top Layer w0.508: W3.2 R10.2 13.054,44.958 15.975,47.879 B3.6
NetB3_11: B3.11 C17.1 C22.2
NetR3_1: R3.1 R4.2 U2.2
NetR3_2: R3.2 U1.6
NetR5_2: R5.2 R6.1 U2.3
NetR6_2: R6.2 U3.2 U3.6
NetR11_1: R11.1 R16.1 U5.3
NetR12_1: R14.2 U5.2
NetR13_1: R15.1 U3.3
NetR14_1: R14.1 U4.6
NetR16_2: R16.2 U6.2 U6.6
NetR17_1: R17.1 R18.1 U6.3
PHA: P?.3 R1.2 U1.3 | length 12.3
  Bottom Layer w0.508: R1.2 94.488,73.152 97.536,70.104 97.536,67.056 P?.3
PHA_A_ADC: D10.2 P1.2 R4.1 U2.6
PHA_B_ADC: D11.2 P1.1 R12.1 U5.6
PHA_BS: B1.14 C2.2 D4.1 D5.2 IC1.2 IC1.3 IC1.5 IC1.6 IC1.7 IC2.8 R1.1 U1.2 | length 24.2
  Bottom Layer w0.508: IC2.8 57.71,80.139 D5.2 ; D4.1 80.974,75.996 82.796,77.818 82.796,79.102 82.942,79.248 IC1.7 86.742,79.248 86.888,79.102 86.888,77.754 91.448,73.194 R1.1
PHB: P?.2 R7.2 U4.3 | length 3
  Bottom Layer w0.508: R7.2 P?.2
PHB_BS: B2.14 C8.2 D6.1 D7.2 IC3.2 IC3.3 IC3.5 IC3.6 IC3.7 IC4.8 R7.1 U4.2 | length 15.6
  Bottom Layer w0.508: D6.1 78.988,58.166 81.52,60.698 81.52,61.068 81.666,61.214 IC3.7 90.228,61.214 91.456,62.442 R7.1
PHC: P?.1 R9.2 | length 6.6
  Bottom Layer w0.508: R9.2 95.504,58.436 P?.1
PHC_BS: B3.14 C12.2 D8.1 D9.2 IC5.2 IC5.3 IC5.5 IC5.6 IC5.7 IC6.8 R9.1 | length 19.4
  Bottom Layer w0.508: D8.1 78.734,41.91 81.272,44.448 81.272,44.812 81.418,44.958 IC5.7 ; IC5.5 83.464,47.644 85.364,47.644 87.63,49.91 87.63,52.578 89.87,54.818 90.928,54.818 90.932,54.822 R9.1
PWM1_A: B1.1 P1.8
PWM1_A_OUT: B1.15 IC1.1 | length 53
  Top Layer w0.508: B1.15 38.608,91.694 ; 50.292,86.868 54.61,91.186 81.534,91.186 v1(83.058,89.662)
  Bottom Layer w0.508: v1(83.058,89.662) 84.842,87.878 IC1.1 IC1.1@84.734,86.976
PWM1_B: B1.2 P1.7
PWM1_B_OUT: B1.10 IC2.1 | length 34.1
  Top Layer w0.508: B1.10 24.521,85.415 25.678,85.415 28.655,88.392 37.084,88.392 ; 48.768,83.566 54.61,89.408 v1(63.5,89.408)
  Bottom Layer w0.508: v1(63.5,89.408) 64.195,88.713 IC2.1
PWM2_A: B2.1 P1.6
PWM2_A_OUT: B2.15 IC3.1 | length 50.6
  Top Layer w0.508: B2.15 29.424,73.533 32.599,76.708 67.647,76.708 ; 79.331,71.882 79.44,71.774 79.864,71.774 v1(80.01,71.628)
  Bottom Layer w0.508: v1(80.01,71.628) 81.52,70.118 81.52,68.98 81.666,68.834 IC3.1
PWM2_B: B2.2 P1.5
PWM2_B_OUT: B2.10 IC4.1 | length 35.5
  Top Layer w0.508: B2.10 24.969,67.183 25.04,67.254 25.04,67.266 25.338,67.564 29.464,67.564 31.75,69.85 31.75,74.168 33.274,75.692 48.851,75.692 ; 60.535,70.866 60.644,70.758 61.068,70.758 v1(61.214,70.612)
  Bottom Layer w0.508: v1(61.214,70.612) 61.968,69.858 61.968,68.726 62.114,68.58 IC4.1
PWM3_A: B3.1 P1.4
PWM3_A_OUT: B3.15 IC5.1 | length 53.2
  Top Layer w0.508: B3.15 24.615,53.03 25.725,53.03 25.781,53.086 27.178,53.086 28.956,54.864 38.354,54.864 ; 50.038,50.038 56.896,56.896 78.232,56.896 v1(80.01,55.118)
  Bottom Layer w0.508: v1(80.01,55.118) 81.272,53.856 81.272,52.724 81.418,52.578 IC5.1
PWM3_B: B3.2 P1.3
PWM3_B_OUT: B3.10 IC6.1 | length 35
  Top Layer w0.508: B3.10 24.607,46.672 27.456,46.672 30.313,49.53 34.798,49.53 45.466,60.198 ; 57.15,55.372 v1(62.992,55.372)
  Bottom Layer w0.508: v1(62.992,55.372) 63.687,54.677 IC6.1
V5: B1.3 B1.8 B2.3 B2.8 B3.3 B3.8 C3.1 C4.2 C9.1 C13.1 C14.2 C20.2 P1.11 | length 18
  Top Layer w0.508: C9.1 C14.2 16.956,73.66 18.282,72.334 19.073,72.334 B2.3 ; C3.1 11.39,90.752 15.42,90.752 C4.2 18.371,90.678 18.625,90.424 B1.3
V12: C1.1 C7.1 C11.1 C15.1 C18.1 C23.1 C24.1 C27.1 C29.1 D1.1 D2.1 D3.1 D4.2 D6.2 D8.2 IC1.8 IC3.8 IC5.8 P1.12 P?.4 R13.1 U1.7 U2.7 U3.7 U4.7 U5.7 U6.7 | length 93.5
  Top Layer w0.508: C1.1 25.283,98.298 25.791,98.806 D1.1 ; C11.1 30.678,59.436 31.898,58.216 D3.1
  Bottom Layer w0.508: D8.2 76.252,46.684 IC5.8 74.416,49.016 IC3.8 ; D6.2 76.506,62.934 IC3.8 ; P?.4 90.932,67.564 86.36,72.136 82.804,72.136 79.6,75.34 79.6,75.9 D4.2 79.554,79.196 IC1.8 75.692,66.3 IC3.8
pads on no net: B1.7 B1.12 B1.13 B2.7 B2.12 B2.13 B3.7 B3.12 B3.13 D10.3 D11.3 R12.2 R13.2 R17.2 U1.5 U1.8 U2.1 U2.5 U2.8 U3.1 U3.5 U3.8 U4.5 U4.8 U5.1 U5.5 U5.8 U6.1 U6.5 U6.8

## Polygon pours and split planes (outlines as drawn)
AGND on Top Layer "AGND_L01_P000" (solid, pour order 0): 22.606,100 100,100 100,29 22.606,29
GND on Top Layer "GND_L01_P001" (solid, pour order 1): 0,100 21.844,100 21.844,28 100,28 100,0 0,0
V5 on Int1 (V5) (split plane): 99.49,0.51 0.51,0.51 0.51,99.49 99.49,99.49
no net on Int2 (PWR) (split plane): 99.49,0.51 0.51,0.51 0.51,99.49 99.49,99.49

## Text inside footprints (layer, text, board x,y; h text height)
U1: Top Overlay "*" at 79.743,22.555 h1.27 r180; Mechanical 13 "*" at 79.743,22.555 h1.27 r180
U2: Top Overlay "*" at 62.217,22.555 h1.27 r180; Mechanical 13 "*" at 62.217,22.555 h1.27 r180
U3: Top Overlay "*" at 22.365,23.673 h1.27; Mechanical 13 "*" at 22.365,23.673 h1.27
U4: Top Overlay "*" at 80.251,9.601 h1.27 r180; Mechanical 13 "*" at 80.251,9.601 h1.27 r180
U5: Top Overlay "*" at 61.709,9.347 h1.27 r180; Mechanical 13 "*" at 61.709,9.347 h1.27 r180
U6: Top Overlay "*" at 23.381,10.211 h1.27; Mechanical 13 "*" at 23.381,10.211 h1.27